# Altium PCB motor4-PCB.PcbDoc (part 2 of 2)
Units mil, origin at the board's own origin, x right, y up, seen from the top; angles counter-clockwise.
Board outline 5665.03 x 3265.03 mil, 2 copper layers (Top Layer, Bottom Layer); 182 components, 188 nets, 677 pads, 124 vias.
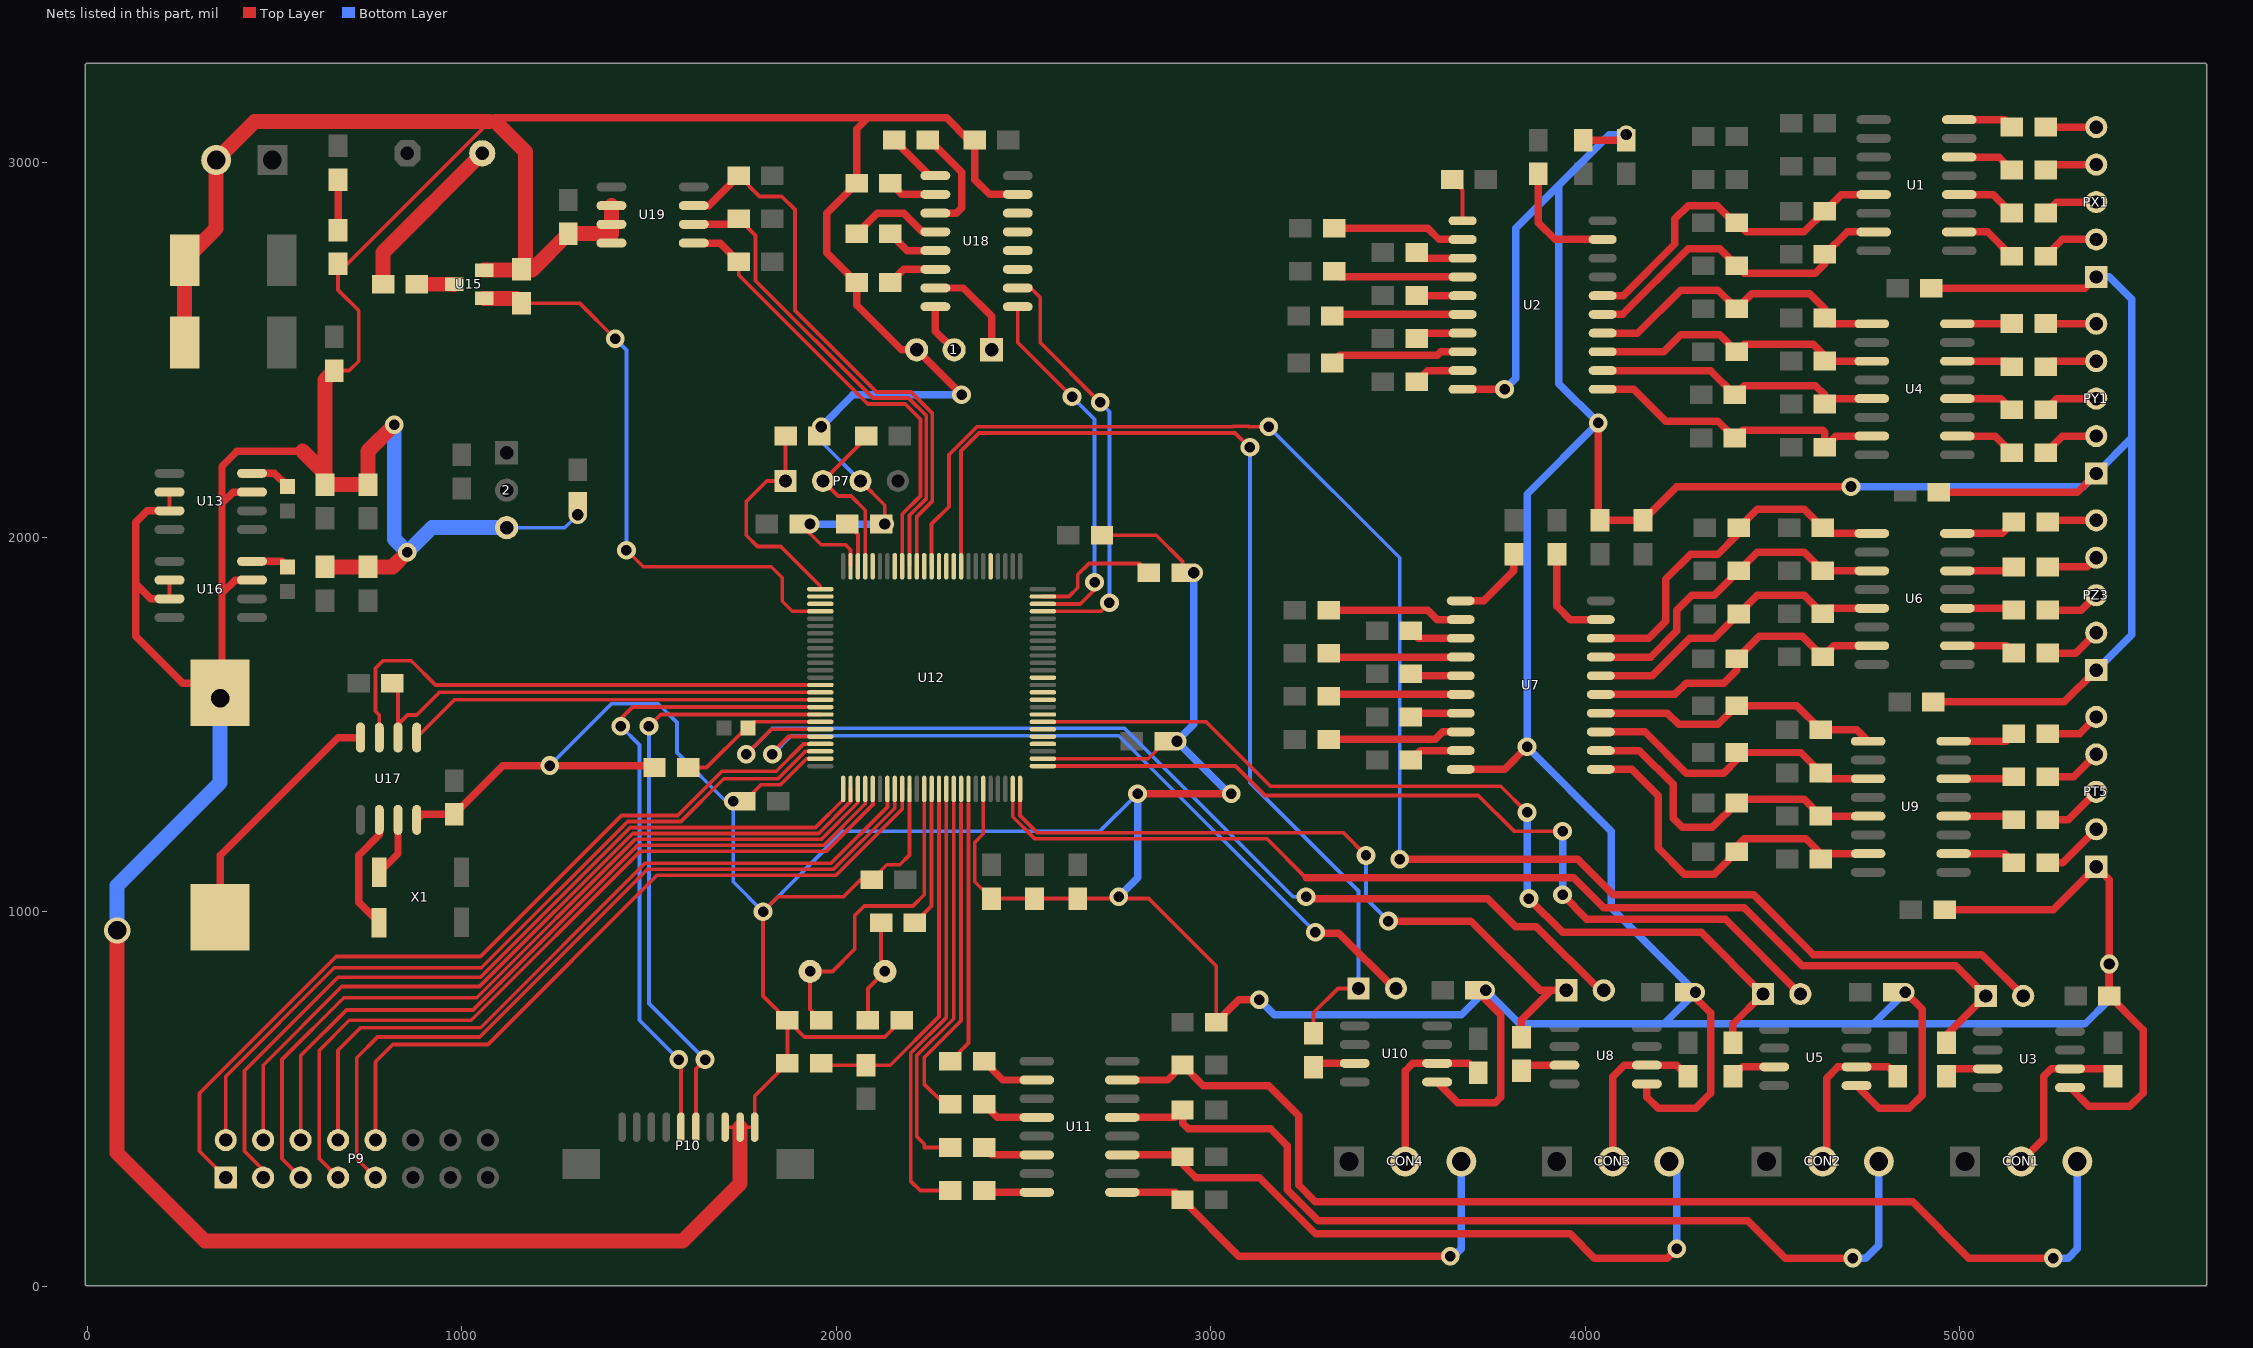
[diagram p2: the nets of this part, all layers, seen from the top]

## Via types
v1: diameter 50, hole 28, Top Layer to Bottom Layer, 64 vias
v2: diameter 50, hole 30, Top Layer to Bottom Layer, 51 vias
v3: diameter 70, hole 50, Top Layer to Bottom Layer, 5 vias
v4: diameter 126, hole 126, Top Layer to Bottom Layer, 4 vias

## Nets (pads, with @x,y where several pads share a name; then routed paths per layer and width w, separated by ;. In a path a pad name is that pad's centre, name@x,y a point inside that pad or via, vN(x,y) a via of type N, cw(c..) or ccw(c..) an arc to the next point about the centre after c; other vN are vias at no path point) (continued)
BREAK_OUT3: R5.1 R9.2 U1.13 U2.16 | length 932.9
  Top Layer w20: U2.16@4047.01,2645 4102.01,2645 4240,2782.99 4240,2850 4275,2885 4353.29,2885 4398.29,2840 R5.1@4405,2840 4430,2815 4584.57,2815 R9.2@4640,2870.43 4684.57,2915 U1.13@4770.83,2915
BREAK_OUT4: R4.2 R8.1 U1.15 U2.15 | length 883.7
  Top Layer w20: U2.15@4047.01,2595 4100,2595 4275,2770 4360,2770 R8.1@4405,2725 4425,2705 4615,2705 4640,2730 R4.2@4640,2755.43 4699.57,2815 U1.15@4770.83,2815
BREAK_OUT5: R11.1 R37.2 U2.14 U4.9 | length 851.3
  Top Layer w20: U2.14@4047.01,2545 4140,2545 4255,2660 4355,2660 R11.1@4405,2610 4445,2650 4600,2650 4640,2610 R37.2@4640,2585.43 4655.43,2570 U4.9@4765.83,2570
BREAK_OUT6: R13.1 R34.2 U2.13 U4.11 | length 791.9
  Top Layer w20: U2.13@4047.01,2495 4210,2495 4255,2540 4360,2540 R13.1@4405,2495 4425.43,2515.43 4609.57,2515.43 4640,2485 R34.2@4640,2470.43 4640.43,2470 U4.11@4765.83,2470
BREAK_OUT7: R17.1 R32.2 U2.12 U4.13 | length 797.1
  Top Layer w20: U2.12@4047.01,2445 4335,2445 R17.1@4400,2380 4425,2405 4615,2405 4640,2380 R32.2@4640,2355.43 4654.57,2370 U4.13@4765.83,2370
BREAK_OUT8: R20.1 R30.2 U2.11 U4.15 | length 835.2
  Top Layer w20: U2.11@4047.01,2395 4130,2395 4215,2310 4355,2310 R20.1@4400,2265 4420.43,2285.43 4634.57,2285.43 4640,2280 R30.2@4640,2240.43 4669.57,2270 U4.15@4765.83,2270
BREAK_OUT9: R39.1 R61.2 U6.9 U7.18 | length 968.8
  Top Layer w20: U7.18@4042.01,1730 4170,1730 4215,1775 4215,1888.28 4281.72,1955 4355,1955 4410,2010 R39.1@4410,2025 4460,2075 4585.43,2075 R61.2@4635,2025.43 4650.43,2010 U6.9@4765.83,2010
BREAK_OUT10: R40.1 R57.2 U6.11 U7.17 | length 892.7
  Top Layer w20: U7.17@4042.01,1680 4175,1680 4245,1750 4245,1805 4285,1845 4345,1845 R40.1@4410,1910 4460,1960 4585.43,1960 R57.2@4635,1910.43 4635.43,1910 U6.11@4765.83,1910
BREAK_OUT11: R41.1 R50.2 U6.13 U7.16 | length 839.4
  Top Layer w20: U7.16@4042.01,1630 4180,1630 4280,1730 4345,1730 R41.1@4410,1795 4460,1845 4585.43,1845 R50.2@4635,1795.43 4649.57,1810 U6.13@4765.83,1810
BREAK_OUT12: R43.1 R45.2 U6.15 U7.15 | length 840.4
  Top Layer w20: U7.15@4042.01,1580 4240,1580 4270,1610 4370,1610 4405,1645 R43.1@4405,1675 4465,1735 4580.43,1735 R45.2@4635,1680.43 4664.57,1710 U6.15@4765.83,1710
BREAK_OUT13: R47.1 R75.2 U7.14 U9.9 | length 786.3
  Top Layer w20: U7.14@4042.01,1530 4220,1530 4250,1500 4355,1500 R47.1@4405,1550 4565.43,1550 R75.2@4630,1485.43 4725.4,1485.43 U9.9@4755.83,1455
BREAK_OUT14: R48.1 R72.2 U7.13 U9.11 | length 822.9
  Top Layer w20: U7.13@4042.01,1480 4160,1480 4270,1370 4370,1370 4405,1405 R48.1@4405,1425 4575.43,1425 R72.2@4630,1370.43 4645.43,1355 U9.11@4755.83,1355
BREAK_OUT15: R52.1 R70.2 U7.12 U9.13 | length 901.5
  Top Layer w20: U7.12@4042.01,1430 4145,1430 4235,1340 4235,1250 4260,1225 4340,1225 R52.1@4405,1290 4415.43,1300.43 4585,1300.43 R70.2@4630,1255.43 4630.43,1255 U9.13@4755.83,1255
BREAK_OUT16: R55.1 R68.2 U7.11 U9.15 | length 997.1
  Top Layer w20: U7.11@4042.01,1380 4125,1380 4195,1310 4195,1170 4265,1100 4345,1100 R55.1@4405,1160 4405,1175 4425,1195 4590,1195 4630,1155 R68.2@4630,1140.43 4644.57,1155 U9.15@4755.83,1155
BREAK_OUTT1: PX1.2 R2.2 | length 153.5
  Top Layer w20: R2.2@5230,2750.43 5274.57,2795 PX1.2@5365,2795
BREAK_OUTT2: PX1.3 R6.2 | length 147.2
  Top Layer w20: R6.2@5230,2865.43 5259.57,2895 PX1.3@5365,2895
BREAK_OUTT3: PX1.4 R12.2 | length 141
  Top Layer w20: R12.2@5230,2980.43 5244.57,2995 PX1.4@5365,2995
BREAK_OUTT4: PX1.5 R18.2 | length 135.2
  Top Layer w20: R18.2@5230,3095.43 5230.43,3095 PX1.5@5365,3095
BREAK_OUTT5: PY1.2 R29.2 | length 153.5
  Top Layer w20: R29.2@5230,2225.43 5274.57,2270 PY1.2@5365,2270
BREAK_OUTT6: PY1.3 R31.2 | length 147.2
  Top Layer w20: R31.2@5230,2340.43 5259.57,2370 PY1.3@5365,2370
BREAK_OUTT7: PY1.4 R33.2 | length 141
  Top Layer w20: R33.2@5230,2455.43 5244.57,2470 PY1.4@5365,2470
BREAK_OUTT8: PY1.5 R36.2 | length 135.2
  Top Layer w20: R36.2@5230,2570.43 5230.43,2570 PY1.5@5365,2570
BREAK_OUTT9: PZ3.2 R44.2 | length 152.6
  Top Layer w20: R44.2@5235,1690.43 5310.43,1690.43 PZ3.2@5365,1745
BREAK_OUTT10: PZ3.3 R49.2 | length 146.4
  Top Layer w20: R49.2@5235,1805.43 5325.43,1805.43 PZ3.3@5365,1845
BREAK_OUTT11: PZ3.4 R56.2 | length 140.2
  Top Layer w20: R56.2@5235,1920.43 5340.43,1920.43 PZ3.4@5365,1945
BREAK_OUTT12: PZ3.5 R60.2 | length 131.9
  Top Layer w20: R60.2@5235,2040.43 5239.57,2045 PZ3.5@5365,2045
BREAK_OUTT13: PT5.2 R67.2 | length 167.1
  Top Layer w20: R67.2@5235,1130.43 5275.43,1130.43 PT5.2@5365,1220
BREAK_OUTT14: PT5.3 R69.2 | length 160.9
  Top Layer w20: R69.2@5235,1245.43 5290.43,1245.43 PT5.3@5365,1320
BREAK_OUTT15: PT5.4 R71.2 | length 154.7
  Top Layer w20: R71.2@5235,1360.43 5305.43,1360.43 PT5.4@5365,1420
BREAK_OUTT16: PT5.5 R74.2 | length 148.5
  Top Layer w20: R74.2@5235,1475.43 5320.43,1475.43 PT5.5@5365,1520
BZ: R89.2 U12.79 U15.B | length 1594.1
  Top Layer w10: R89.2@1147,2638 R89.2@1160,2625 1315,2625 v1(1410,2530) ; v1(1440,1965) 1441,1965 1485,1921 1826.63,1921 1856,1891.63 1856,1829 1882.83,1802.17 U12.79@1957.76,1802.17
  Top Layer w40: U15.B@1060,2638 R89.2@1147,2638
  Bottom Layer w10: v1(1410,2530) 1440,2500 v1(1440,1965)
CE_1302: U12.91 U17.5 | length 1119.6
  Top Layer w10: U17.5@880,1465 980.94,1565.94 U12.91@1957.76,1565.94
CLK_1302: U12.89 U17.7 | length 1412
  Top Layer w10: U17.7@780,1465 780,1525 770,1535 770,1650 790,1670 865.32,1670 930,1605.32 U12.89@1957.76,1605.32
DGND: 1.3 2.3 BAT1.2 C1.2 C2.1 C3.2 C4.1 C5.2 C6.1 C7.2 C8.1 C9.2 C10.2 C11.1 C12.1 C13.2 C14.2 C15.1 C16.1 C17.1 C18.1 C19.2 C20.1 C21.1 C22.2 C23.1 C24.1 C25.2 C27.2 C28.2 C30.2 C31.2 C32.1 C33.2 C34.2 C36.2 C37.1 C38.2 C40.1 C41.2 C42.2 C43.2 CON5.2 L1.2 P7.3 P10.8 P10.9 P10.10 PT5.1 PX1.1 PY1.1 PZ3.1 R87.2 R89.1 R92.1 U2.10 U3.5 U5.5 U7.10 U8.5 U10.5 U12.10 U12.20 U12.27 U12.74 U12.99 U13.3 U13.6 U13.7 U15.E U16.3 U16.6 U16.7 U17.4 U18.15 U19.2 U19.3 U19.4 | length 35353
  Top Layer w10: U16.7@220,1835.43 U16.6@220,1885.43 ; U13.7@220,2070.43 U13.6@220,2120.43 ; C25.2@660,2445 700,2445 725,2470 725,2605 670,2660 L1.2@670,2730 695,2730 1009,3044 1009,3044.05 1074.95,3110 1090,3110 ; P10.8@1703.5,424.5 P10.9@1743.5,424.5 P10.10@1782.5,424.5 1782.5,507.5 C38.2@1870,595 C33.2@1870,710 ; v1@1705,1295 C14.2@1755,1295 1799,1339 1851.63,1339 1921.09,1408.46 U12.99@1957.76,1408.46 ; C17.1@1905,2035 1960,1980 2025,1980 2038.46,1966.54 U12.74@2038.46,1922.24 ; P7.3@2065,2150 2130,2085 v2(2130,2035) ; C34.2@2175,710 2130,665 1915,665 C33.2@1870,710 ; U12.10@2195.94,1327.76 2195.94,1150.94 2170,1125 2135,1125 C24.1@2095,1085 2065,1085 2020,1040 1845,1040 v1(1805,1000) 1805,775 C33.2@1870,710 ; U12.20@2392.8,1327.76 2392.8,1207.8 2370,1185 2370,1080 C21.1@2415,1035 C20.1@2530,1035 C16.1@2645,1035 2835,1035 3015,855 C13.2@3015,705 ; U12.27@2552.24,1408.46 2833.47,1408.46 C18.1@2885,1460 ; C15.1@2710,2005 2855,2005 2925,1935 C41.2@2925,1905
  Top Layer w20: U16.7@220,1835.43 170,1835.43 130,1875.43 ; U13.7@220,2070.43 160.43,2070.43 130,2040 130,1875.43 ; U16.3@440,1885.43 395.43,1885.43 360,1850 ; U13.3@440,2120.43 390.43,2120.43 360,2090 ; 575,2230 400,2230 360,2190 360,2090 ; U17.4@880,1245 895,1260 C32.1@980,1260 1110,1390 v1(1235,1390) 1510,1390 R92.1@1515,1385 ; 1090,3120 2085,3120 ; v1(2335,2380) 2335,2380.43 1.3@2215,2500.43 2174.57,2500.43 2055,2620 C40.1@2055,2680 1975,2760 1975,2865.43 C37.1@2055,2945.43 2055,3090 2085,3120 ; U18.15@2485,2915.43 2409.57,2915.43 2370,2955 C36.2@2370,3060.43 2354.57,3060.43 2295,3120 2085,3120 ; v1(2805,1315) v1(3055,1315) ; C13.2@3015,705 3075,765 v1(3130,765) ; U10.5@3605,545 3660,490 3760,490 3775,505 3775,725 C12.1@3710,790 ; U7.10@3667.99,1380 3785,1380 v1(3845,1440) ; U2.10@3672.99,2395 v1(3785,2395) ; C3.2@3995,3060 C4.1@4110,3060 ; v1(4035,2305) 4035,2050 C10.2@4040,2045 C11.1@4155,2045 4245,2135 v2(4710,2135) ; U8.5@4165,540 4165,505 4195,475 4295,475 4335,515 4335,730 4280,785 C8.1@4270,785 ; U5.5@4725,535.43 4725,535 4785,475 4865,475 4900,510 4900,740 v2(4855,785) ; C1.2@4925,2665 5335,2665 PX1.1@5365,2695 ; C7.2@4930,1560 5280,1560 PZ3.1@5365,1645 ; C5.2@4945,2120 5315,2120 PY1.1@5365,2170 ; C9.2@4960,1005 5250,1005 PT5.1@5365,1120 5400,1085 C2.1@5400,775 5490,685 5490,515 5455,480 5345.43,480 U3.5@5295,530.43 ; 130,1875.43 130,1735 255,1610 360,1610 360,1850 ; 360,1850 360,2090
  Top Layer w40: v3(80,950) 80,355 315,120 1590,120 1743.5,273.5 P10.9@1743.5,424.5 ; C19.2@260,2520 C22.2@260,2740 344.45,2824.45 CON5.2@344.45,3007.2 447.24,3110 1074.95,3110 ; 575,2230 C27.2@635,2170 ; C30.2@635,1920.43 C31.2@750,1920.43 815.43,1920.43 v1(855,1960) ; C25.2@660,2445 635,2420 C27.2@635,2170 ; v1(820,2300) 750,2230 C28.2@750,2140.43 C27.2@635,2140.43 C27.2@635,2170 ; U15.E@1060,2713 1187.57,2713 C43.2@1285,2810.43 1399.57,2810.43 1400,2810 U19.3@1400,2835.43 U19.2@1400,2885.43 ; 1090,3110 1170,3030 1170,2725 R89.1@1160,2715
  Bottom Layer w10: 2.3@1120,2025.43 1275.43,2025.43 v2(1310,2060) ; v1(1235,1390) 1400,1555 1525,1555 1575,1505 1575,1425 v1@1705,1295 ; v1(1725,1295) 1725,1080 v1(1805,1000) 2020,1215 2705,1215 v1(2805,1315) ; v2(1960,2295) 1960,2255 P7.3@2065,2150
  Bottom Layer w20: v2(1930,2035) v2(2130,2035) ; v2(1960,2295) 2045,2380 v1(2335,2380) ; v1(2755,1040) 2805,1090 v1(2805,1315) ; v2(2955,1905) 2955,1500 v2(2910,1455) 3050,1315 v1(3055,1315) ; v1(3130,765) 3170,725 3670,725 v2(3735,790) 3825,700 4210,700 ; v1(3785,2395) 3815,2425 3815,2825 3930,2940 ; v2(4110,3075) 4065,3075 3930,2940 ; v2(4710,2135) 5330,2135 PY1.1@5365,2170 5460,2265 ; v2(4855,785) 4770,700 ; PZ3.1@5365,1645 5460,1740 5460,2265 ; PX1.1@5365,2695 5400,2695 5460,2635 5460,2265 ; v2(5400,860) 5400,765 5335,700 4770,700 ; 3930,2940 3930,2410 v1(4035,2305) 3845,2115 v1(3845,1440) 4070,1215 4070,1010 v2(4295,785) 4210,700 ; 4210,700 4770,700
  Bottom Layer w40: v3(80,950) 80,1070 355,1345 v3(355,1570) ; v1(820,2300) 820,1995 v1(855,1960) 920.43,2025.43 2.3@1120,2025.43
DIR_1: R77.2 U12.18 | length 708
  Top Layer w10: R77.2@2305,600.43 2353.43,648.85 2353.43,1288.35
DIR_2: R79.2 U12.17 | length 881.4
  Top Layer w10: R79.2@2305,485.43 2289.57,485.43 2235,540 2235,610 2333.43,708.43 2333.43,1288.03
DIR_3: R81.2 U12.16 | length 1076.6
  Top Layer w10: R81.2@2305,370.43 2235,370.43 2235,380 2215,400 2215,615 2314.06,714.06 U12.16@2314.06,1327.76
DIR_4: R83.2 U12.15 | length 1202.9
  Top Layer w10: U12.15@2294.37,1327.76 2294.37,717 2199,621.63 2199,281 2224.57,255.43 R83.2@2305,255.43
DIR_T: CON4.3 R84.2 U11.9 | length 1217.3
  Top Layer w20: U11.9@2764.17,250.43 2905,250.43 R84.2@2925,230.43 3075.43,80 v1(3640,80)
  Bottom Layer w20: v1(3640,80) 3650,80 3669.49,99.49 CON4.3@3669.49,332.8
DIR_X: CON1.3 R78.2 U11.15 | length 3132.2
  Top Layer w20: U11.15@2764.17,550.43 2885,550.43 R78.2@2925,590.43 2980.43,535 3155,535 3235,455 3235,270 3280,225 4875,225 5025,75 v1(5250,75)
  Bottom Layer w20: v1(5250,75) 5290,75 5314.49,99.49 CON1.3@5314.49,332.8
DIR_Y: CON2.3 R80.2 U11.13 | length 2519.5
  Top Layer w20: U11.13@2764.17,450.43 2905,450.43 R80.2@2925,470.43 2925,435 2940,420 3160,420 3205,375 3205,257.57 3287.57,175 4435,175 4535,75 v1(4715,75)
  Bottom Layer w20: v1(4715,75) 4750,75 4784.49,109.49 CON2.3@4784.49,332.8
DIR_Z: CON3.3 R82.2 U11.11 | length 1858.5
  Top Layer w20: U11.11@2764.17,350.43 2920,350.43 R82.2@2925,345.43 2925,325 2960,290 3130.15,290 3280.15,140 3960,140 4025,75 4220,75 v1(4245,100)
  Bottom Layer w20: CON3.3@4224.49,332.8 4245,312.28 v1(4245,100)
I2C_SCL_1: R95.1 U12.66 U19.6 | length 1336.2
  Top Layer w10: R95.1@1740,2850.43 1785,2805.43 1785,2685 2098.5,2371.5 2193.5,2371.5 2241,2324 2241,2103.37 2195.94,2058.32 U12.66@2195.94,1922.24
  Top Layer w20: U19.6@1620,2835.43 1725,2835.43 R95.1@1740,2850.43
I2C_SDA_1: R96.1 U12.67 U19.5 | length 1233.6
  Top Layer w10: R96.1@1740,2735.43 1740,2700 2084.5,2355.5 2184.5,2355.5 2225,2315 2225,2110 2176.26,2061.26 U12.67@2176.26,1922.24
  Top Layer w20: U19.5@1620,2785.43 1690,2785.43 R96.1@1740,2735.43
I2C_WP_1: R94.1 U12.65 U19.7 | length 1516.8
  Top Layer w10: R94.1@1740,2965.43 1795.43,2910 1855,2910 1890,2875 1890,2605 2107.5,2387.5 2200.13,2387.5 2257,2330.63 2257,2096.75 2215.63,2055.38 U12.65@2215.63,1922.24
  Top Layer w20: U19.7@1620,2885.43 1660,2885.43 R94.1@1740,2965.43
IO_1302: R90.1 U12.90 U17.6 | length 1314.4
  Top Layer w10: R90.1@815,1610 830,1595 U17.6@830,1500 ; U17.6@830,1465 U17.6@830,1500 ; U12.90@1957.76,1585.63 940.63,1585.63 880,1525 855,1525 U17.6@830,1500
NetC26_2: C26.2 U13.4 | length 109.5
  Top Layer w20: U13.4@440,2170.43 500,2170.43 C26.2@535,2135.43
NetC29_2: C29.2 U16.4 | length 101.2
  Top Layer w20: U16.4@440,1935.43 520,1935.43 C29.2@535,1920.43
NetC33_1: C33.1 U12.12 Y1.1 | length 867.6
  Top Layer w10: C33.1@1960,710 1930.37,739.63 Y1.1@1930.37,840.28 1990.28,840.28 2050,900 2050,990 2075,1015 2205,1015 2235.31,1045.32 U12.12@2235.31,1327.76
NetC34_1: C34.1 R91.2 Y1.2 | length 283.1
  Top Layer w10: C34.1@2085,710 2085,794.91 Y1.2@2130.37,840.28 2120,850.65 R91.2@2120,970
NetC35_1: C35.1 U18.3 | length 296.4
  Top Layer w20: C35.1@2245,3060.43 2249.57,3060.43 2335,2975 2335,2880 2320.43,2865.43 U18.3@2265,2865.43
NetC35_2: C35.2 U18.1 | length 149.3
  Top Layer w20: C35.2@2155,3060.43 2250,2965.43 U18.1@2265,2965.43
NetC37_2: C37.2 U18.2 | length 132.4
  Top Layer w20: C37.2@2145,2945.43 2175,2915.43 U18.2@2265,2915.43
NetC38_1: C38.1 R93.1 U12.14 | length 978.2
  Top Layer w10: C38.1@1960,595 1965,590 R93.1@2080,590 2144.37,590 2274.69,720.32 U12.14@2274.69,1327.76
NetC39_1: C39.1 U18.5 | length 138.5
  Top Layer w20: C39.1@2145,2810 2189.57,2765.43 U18.5@2265,2765.43
NetC39_2: C39.2 U18.4 | length 253.3
  Top Layer w20: C39.2@2055,2810 2110,2865 2180,2865 2229.57,2815.43 U18.4@2265,2815.43
NetC40_2: C40.2 U18.6 | length 134.7
  Top Layer w20: C40.2@2145,2680 2180.43,2715.43 U18.6@2265,2715.43
NetC41_1: C41.1 U12.49 | length 350.3
  Top Layer w10: U12.49@2552.24,1841.54 2621.54,1841.54 2645,1865 2645,1900 2675,1930 2810,1930 C41.1@2835,1905
NetC42_1: C42.1 U12.73 | length 124.4
  Top Layer w10: C42.1@2030,2035 2058.15,2006.85 U12.73@2058.15,1922.24
NetL1_1: L1.1 R85.1 | length 135
  Top Layer w20: L1.1@670,2820 R85.1@670,2955
NetP7_1: P7.1 R87.1 U12.76 | length 600
  Top Layer w10: R87.1@1865,2270 P7.1@1865,2150 1815,2150 1760,2095 1760,2005 1790,1975 1852.37,1975 1957.76,1869.62 U12.76@1957.76,1861.22
NetP7_2: P7.2 R86.2 U12.72 | length 462.6
  Top Layer w10: U12.72@2077.83,1922.24 2077.83,2072.17 2040,2110 2005,2110 P7.2@1965,2150 2080,2265 R86.2@2080,2270
NetP8_1: P8.1 R92.2 U12.94 | length 403.2
  Top Layer w10: R92.2@1605,1385 1654.09,1385 1759.09,1490 P8.1@1765,1490 1781.89,1506.89 U12.94@1957.76,1506.89
NetR2_1: R2.1 U1.2 | length 167.6
  Top Layer w20: U1.2@4999.17,2815 5075.43,2815 R2.1@5140,2750.43
NetR6_1: R6.1 U1.4 | length 161.4
  Top Layer w20: U1.4@4999.17,2915 5090.43,2915 R6.1@5140,2865.43
NetR7_2: R7.2 U2.19 | length 320.6
  Top Layer w20: R7.2@3875,2970 3875,2840 3920,2795 U2.19@4047.01,2795
NetR10_2: R10.2 U2.1 | length 121.6
  Top Layer w10: R10.2@3645,2955 3672.99,2927.01 U2.1@3672.99,2845
NetR12_1: R12.1 U1.6 | length 155.1
  Top Layer w20: U1.6@4999.17,3015 5105.43,3015 R12.1@5140,2980.43
NetR16_2: R16.2 U2.2 | length 355.4
  Top Layer w20: R16.2@3330,2825 3580,2825 3610,2795 U2.2@3672.99,2795
NetR18_1: R18.1 U1.8 | length 148.9
  Top Layer w20: U1.8@4999.17,3115 5120.43,3115 R18.1@5140,3095.43
NetR19_2: R19.2 U2.3 | length 129.4
  Top Layer w20: R19.2@3550,2760.43 3565.43,2745 U2.3@3672.99,2745
NetR22_2: R22.2 U2.4 | length 349.4
  Top Layer w20: R22.2@3330,2710.43 3345.43,2695 U2.4@3672.99,2695
NetR23_2: R23.2 U2.5 | length 123.2
  Top Layer w20: R23.2@3550,2645.43 3550.43,2645 U2.5@3672.99,2645
NetR24_2: R24.2 U3.3 | length 128.5
  Top Layer w20: R24.2@4955,560 4975.43,580.43 U3.3@5075,580.43
NetR25_2: R25.2 U2.6 | length 349.9
  Top Layer w20: R25.2@3325,2590.43 3329.57,2595 U2.6@3672.99,2595
NetR26_2: R26.2 U2.7 | length 129
  Top Layer w20: R26.2@3550,2530.43 3564.57,2545 U2.7@3672.99,2545
NetR27_2: R27.2 U2.8 | length 360.2
  Top Layer w20: R27.2@3325,2465.43 3345,2485.43 3605,2485.43 3614.57,2495 U2.8@3672.99,2495
NetR28_2: R28.2 U2.9 | length 135.2
  Top Layer w20: R28.2@3550,2415.43 3579.57,2445 U2.9@3672.99,2445
NetR29_1: R29.1 U4.2 | length 164.3
  Top Layer w20: U4.2@4994.17,2270 5095.43,2270 R29.1@5140,2225.43
NetR31_1: R31.1 U4.4 | length 158.1
  Top Layer w20: U4.4@4994.17,2370 5110.43,2370 R31.1@5140,2340.43
NetR33_1: R33.1 U4.6 | length 151.9
  Top Layer w20: U4.6@4994.17,2470 5125.43,2470 R33.1@5140,2455.43
NetR36_1: R36.1 U4.8 | length 146
  Top Layer w20: U4.8@4994.17,2570 5139.57,2570 R36.1@5140,2570.43
NetR38_2: R38.2 U5.3 | length 120.5
  Top Layer w20: R38.2@4395,560 4420.43,585.43 U5.3@4505,585.43
NetR42_2: R42.2 U7.19 | length 271.5
  Top Layer w20: R42.2@3925,1955 3925,1815 3960,1780 U7.19@4042.01,1780
NetR44_1: R44.1 U6.2 | length 158.9
  Top Layer w20: U6.2@4994.17,1710 5125.43,1710 R44.1@5145,1690.43
NetR46_2: R46.2 U7.1 | length 220.1
  Top Layer w20: U7.1@3667.99,1830 3730,1830 3810,1910 R46.2@3810,1955
NetR49_1: R49.1 U6.4 | length 152.7
  Top Layer w20: U6.4@4994.17,1810 5140.43,1810 R49.1@5145,1805.43
NetR51_2: R51.2 U7.2 | length 363.3
  Top Layer w20: R51.2@3315,1805 3580,1805 3605,1780 U7.2@3667.99,1780
NetR54_2: R54.2 U7.3 | length 141.3
  Top Layer w20: R54.2@3535,1750 3555,1730 U7.3@3667.99,1730
NetR56_1: R56.1 U6.6 | length 155.1
  Top Layer w20: U6.6@4994.17,1910 5134.57,1910 R56.1@5145,1920.43
NetR58_2: R58.2 U7.4 | length 357.1
  Top Layer w20: R58.2@3315,1690 3325,1680 U7.4@3667.99,1680
NetR59_2: R59.2 U7.5 | length 135.1
  Top Layer w20: R59.2@3535,1635 3540,1630 U7.5@3667.99,1630
NetR60_1: R60.1 U6.8 | length 163.4
  Top Layer w20: U6.8@4994.17,2010 5114.57,2010 R60.1@5145,2040.43
NetR62_2: R62.2 U7.6 | length 355.1
  Top Layer w20: R62.2@3315,1575 3320,1580 U7.6@3667.99,1580
NetR63_2: R63.2 U8.3 | length 121.2
  Top Layer w20: R63.2@3830,575 3845,590 U8.3@3945,590
NetR64_2: R64.2 U7.7 | length 137.1
  Top Layer w20: R64.2@3535,1520 3545,1530 U7.7@3667.99,1530
NetR65_2: R65.2 U7.8 | length 361.3
  Top Layer w20: R65.2@3315,1460 3600,1460 3620,1480 U7.8@3667.99,1480
NetR66_2: R66.2 U7.9 | length 143.3
  Top Layer w20: R66.2@3535,1405 3560,1430 U7.9@3667.99,1430
NetR67_1: R67.1 U9.2 | length 171
  Top Layer w20: U9.2@4984.17,1155 5120.43,1155 R67.1@5145,1130.43
NetR69_1: R69.1 U9.4 | length 164.8
  Top Layer w20: U9.4@4984.17,1255 5135.43,1255 R69.1@5145,1245.43
NetR71_1: R71.1 U9.6 | length 163.1
  Top Layer w20: U9.6@4984.17,1355 5139.57,1355 R71.1@5145,1360.43
NetR74_1: R74.1 U9.8 | length 169.3
  Top Layer w20: U9.8@4984.17,1455 5124.57,1455 R74.1@5145,1475.43
NetR76_2: R76.2 U10.3 | length 114.1
  Top Layer w20: R76.2@3275,585 3285,595 U10.3@3385,595
NetR77_1: R77.1 U11.2 | length 161.5
  Top Layer w20: R77.1@2395,600.43 2445,550.43 U11.2@2535.83,550.43
NetR79_1: R79.1 U11.4 | length 155.3
  Top Layer w20: R79.1@2395,485.43 2430,450.43 U11.4@2535.83,450.43
NetR81_1: R81.1 U11.6 | length 149.1
  Top Layer w20: R81.1@2395,370.43 2415,350.43 U11.6@2535.83,350.43
NetR83_1: R83.1 U11.8 | length 142.9
  Top Layer w20: R83.1@2395,255.43 2400,250.43 U11.8@2535.83,250.43
NetR88_1: R88.1 U15.C | length 100.2
  Top Layer w40: R88.1@880,2675.43 979.57,2675.43 U15.C@980,2675
NetR88_2: R88.2 U14.2 | length 459.3
  Top Layer w40: R88.2@790,2675.43 790,2760 U14.2@1055,3025
NetR91_1: R91.1 U12.13 | length 376.4
  Top Layer w10: R91.1@2210,970 2255,1015 U12.13@2255,1327.76
NetU17_2: U17.2 X1.2 | length 319.2
  Top Layer w20: X1.2@779.02,970.98 725,1025 725,1150 780,1205 U17.2@780,1245
NetU17_3: U17.3 X1.1 | length 160.7
  Top Layer w20: X1.1@780,1105 830,1155 U17.3@830,1245
PA4: U12.29
PC0: U12.35
PC1: U12.36
PC2: U12.78
PC4: U12.33
PC12: U12.55
PC13: P9.8 U12.7 | length 2024.3
  Top Layer w10: P9.8@670,390 670,630 730,690 1050.76,690 1489.76,1129 1986.6,1129 2136.89,1279.29 U12.7@2136.89,1327.76
PC14: P9.9 U12.8 | length 2104.7
  Top Layer w10: P9.9@770,290 720,340 720,610 775,665 1048.39,665 1496.39,1113 1993.22,1113 2156.57,1276.35 U12.8@2156.57,1327.76
PC15: P9.10 U12.9 | length 1949
  Top Layer w10: P9.10@770,390 770,599 816,645 1070,645 1522,1097 1999.85,1097 2176.26,1273.41 U12.9@2176.26,1327.76
PE0: P9.1 U12.97 | length 2298.1
  Top Layer w10: P9.1@370,290 300,360 300,515 665,880 1050,880 1427,1257 1577,1257 1695,1375 1840,1375 1912.83,1447.83 U12.97@1957.76,1447.83
PE1: P9.2 U12.98 | length 2117.4
  Top Layer w10: P9.2@370,390 370,560 660,850 1052.37,850 1443.37,1241 1586,1241 1700,1355 1845,1355 1918.15,1428.15 U12.98@1957.76,1428.15
PE2: P9.3 U12.1 | length 2233.3
  Top Layer w10: P9.3@470,290 470,310 420,360 420,575 670,825 1050,825 1450,1225 1945,1225 2018.78,1298.78 U12.1@2018.78,1327.76
PE3: P9.4 U12.2 | length 2093.8
  Top Layer w10: P9.4@470,390 470,590 680,800 1047.63,800 1456.63,1209 1953.46,1209 2038.46,1294.01 U12.2@2038.46,1327.76
PE4: P9.5 U12.3 | length 2195.5
  Top Layer w10: P9.5@570,290 520,340 520,605 685,770 1040.25,770 1463.25,1193 1960.09,1193 2059.06,1291.97 2059.06,1326.85 U12.3@2058.15,1327.76
PE5: P9.6 U12.4 | length 2051.3
  Top Layer w10: P9.6@570,390 570,615 692.12,737.12 1030,737.12 1469.88,1177 1966.71,1177 2077.83,1288.12 U12.4@2077.83,1327.76
PE6: P9.7 U12.5 | length 2152.9
  Top Layer w10: P9.7@670,290 620,340 620,630 700,710 1025.51,710 1476.51,1161 1973.34,1161 2098.43,1286.08 2098.43,1326.85 U12.5@2097.52,1327.76
PE7: U12.38
RX3: P10.6 U12.93 | length 1613.6
  Top Layer w10: v1(1500,1495) 1531.57,1526.57 U12.93@1957.76,1526.57 ; P10.6@1625.5,424.5 1625.5,580.5 v1(1650,605)
  Bottom Layer w10: v1(1500,1495) 1500,755 v1(1650,605)
RXD: U18.14
RXD2: 1.1 U18.7 | length 270.8
  Top Layer w20: U18.7@2265,2665.43 2339.57,2665.43 2415,2590 1.1@2415,2500.43
TIM1_BKIN: U12.31
TIM1_CH2: U12.68
TIM1_ETR: U12.71
TIM2_CH1_ETR: U12.30
TIM2_CH2: P1.1 R24.1 U12.24 | length 3039.4
  Top Layer w10: U12.24@2471.54,1327.76 2471.54,1253.46 2530,1195 3150,1195 3255,1090
  Top Layer w20: 3255,1090 3970,1090 4050,1010 4425,1010 4580,855 4990,855 P1.1@5070,775 4965,670 R24.1@4965,650
TIM2_PWM1: CON1.2 R15.1 U3.6 | length 454.2
  Top Layer w20: CON1.2@5164.49,332.8 5225,393.31 5225,560 5245.43,580.43 U3.6@5295,580.43 5389.57,580.43 R15.1@5410,560
TIM3_CH2: P2.1 R38.1 U12.32 | length 2518.8
  Top Layer w10: U12.32@2552.24,1506.89 2988.11,1506.89 3160,1335 3775,1335 v1(3845,1265)
  Top Layer w20: v1(3850,1035) 3940,945 4310,945 P2.1@4475,780 4395,700 R38.1@4395,650
  Bottom Layer w20: v1(3845,1265) 3845,1040 v1(3850,1035)
TIM3_ETR: U12.77
TIM3_PWM2: CON2.2 R35.1 U5.6 | length 462.7
  Top Layer w20: CON2.2@4615.51,317.63 4645,347.12 4645,555 4675.43,585.43 U5.6@4725,585.43 4809.57,585.43 R35.1@4835,560
TIM4_CH1: P6.1 R76.1 U12.59 | length 2881.9
  Top Layer w10: U12.59@2333.74,1922.24 2333.74,2230.11 2381.81,2278.19 3065,2278.19 3103.19,2240 v1(3105,2240) ; R76.1@3275,675 3275,730 3340,795 P6.1@3395,795
  Bottom Layer w10: v1(3105,2240) 3105,1345 3395,1055 P6.1@3395,795
TIM4_CH2: U12.60
TIM4_CH3: U12.61
TIM4_CH4: U12.62
TIM4_PWM4: CON4.2 R73.1 U10.6 | length 456.1
  Top Layer w20: CON4.2@3519.49,332.8 3519.49,574.49 3540,595 U10.6@3605,595 3690,595 R73.1@3715,570
TIM5_CH3: P4.1 R63.1 U12.25 | length 1948.8
  Top Layer w10: U12.25@2491.22,1327.76 2491.22,1256.41 2536.63,1211 3354,1211 v1(3415,1150)
  Top Layer w20: v1(3475,975) 3695,975 3880,790 3910,790 ; R63.1@3830,665 3830,710 3910,790 ; P4.1@3950,790 3910,790
  Bottom Layer w10: v1(3415,1150) 3415,1035 v1(3475,975)
TIM5_PWM3: CON3.2 R53.1 U8.6 | length 452.3
  Top Layer w20: CON3.2@4074.49,332.8 4074.49,559.49 4105,590 U8.6@4165,590 4245,590 R53.1@4275,560
TIM8_CH1: P1.2 U12.63 | length 4318.9
  Top Layer w10: U12.63@2255,1922.24 2255,2035 2301.31,2081.31 2301.31,2220.31 2376,2295 3060,2295 3061,2296 3101.63,2296 3102.63,2295 v1(3155,2295)
  Top Layer w20: v1(3505,1140) 3980,1140 4075,1045 4450,1045 4610,885 5060,885 P1.2@5170,775
  Bottom Layer w10: v1(3155,2295) 3505,1945 v1(3505,1140)
TIM8_CH2: U12.64
TIM9_CH2: P2.2 U12.26 | length 2374.5
  Top Layer w10: U12.26@2552.24,1388.78 3066.22,1388.78 3145,1310 3715,1310 3810,1215 v1(3940,1215)
  Top Layer w20: v1(3940,1045) 4005,980 4375,980 P2.2@4575,780
  Bottom Layer w20: v1(3940,1045) v1(3940,1215)
TIM10_CH1: P4.2 U12.95 | length 2834.5
  Top Layer w10: v1(1760,1420) 1827.2,1487.2 U12.95@1957.76,1487.2
  Top Layer w20: v1(3255,1040) 3260,1035 3740,1035 3815,960 3870,960 4040,790 P4.2@4050,790
  Bottom Layer w10: v1(1760,1420) 1830,1490 2770,1490 3220,1040 v1(3255,1040)
TIM11_CH1: P6.2 U12.96 | length 2121.7
  Top Layer w10: v1(1830,1420) 1825,1420 1872.52,1467.52 U12.96@1957.76,1467.52
  Top Layer w20: v1@3280,942.5 3342.5,942.5 3490,795 P6.2@3495,795
  Bottom Layer w10: v1(1830,1420) 1880,1470 2755,1470 v1(3280,945)
TX3: P10.5 U12.92 | length 1711
  Top Layer w10: v1(1425,1495) 1415,1505 1456.26,1546.26 U12.92@1957.76,1546.26 ; v1(1580,605) 1585.5,599.5 P10.5@1585.5,424.5
  Bottom Layer w10: v1(1425,1495) 1475,1445 1475,710 v1(1580,605)
TXD: U18.13
TXD2: 1.2 U18.8 | length 135.7
  Top Layer w20: U18.8@2265,2615.43 2265,2550.43 1.2@2315,2500.43
UART_RX: U18.12
UART_TX: U18.11
USART1_RX: U12.48 U18.9 | length 1002.2
  Top Layer w10: U18.9@2485,2615.43 2485,2520 v1(2630,2375) ; U12.48@2552.24,1821.85 2651.85,1821.85 2700,1870 v1(2690,1880)
  Bottom Layer w10: v1(2630,2375) 2690,2315 v1(2690,1880)
USART1_TX: U12.47 U18.10 | length 1149.4
  Top Layer w10: U18.10@2485,2665.43 2519.57,2665.43 2545,2640 2545,2520 v1(2705,2360) ; U12.47@2552.24,1802.17 2707.17,1802.17 v1(2730,1825)
  Bottom Layer w10: v1(2705,2360) 2730,2335 v1(2730,1825)
VBAT: BAT1.1 U17.8 | length 670.5
  Top Layer w20: BAT1.1@355,985 355,1150 670,1465 U17.8@730,1465
pads on no net: P9.11 P9.12 P9.13 P9.14 P9.15 P9.16 P10.0 P10.4 P10.7 U3.1 U3.4 U5.1 U5.4 U8.1 U8.4 U10.1 U10.4 U12.6 U12.23 U12.34 U12.37 U12.56 U12.57 U12.58 U12.69 U12.70 X1.
copper on no net:
  other v4: 120,160 5530,160 120,3165 5530,3165

## Keep-outs
Keep-Out Layer:
  lines w10: 0,705.43 0,3260.43 5655,3260.43 5655,5.43 105,5.43 0,5.43 0,110.43 0,1310.43

## Silkscreen, mask and mechanical layers (free items; w line width, h text height)
Top Overlay:
  lines w10: 2785,2515 2785,3230 ; 2935,2485 2980,2530 2980,3230 ; 4470,2175 4470,3150 4530,3210 ; 4480,2105 4480,1060 4520,1020
  text "1" at 4555,3175 h60
  text "2" at 2765,2430 h60
  text "1" at 2910,2400 h60
  text "2" at 4540,970 h60

## Text inside footprints (layer, text, board x,y; h text height)
P9: Top Overlay "2" at 270,370 h50; Top Overlay "1" at 270,270 h50; Top Overlay "15" at 1130,270 h50; Top Overlay "16" at 1130,370 h50